# Altium PCB SCMLI_Snipped.PcbDoc (part 3 of 5)
Units mil, origin at the board's own origin, x right, y up, seen from the top; angles counter-clockwise.
Board outline 12129 x 3278 mil, 4 copper layers (Top Layer, GNDPlane, PowRet, Bottom Layer), stack 25.6 mil thick; 452 components, 391 nets, 1786 pads, 827 vias.
Unrouted connection lines stored in the file: 1.
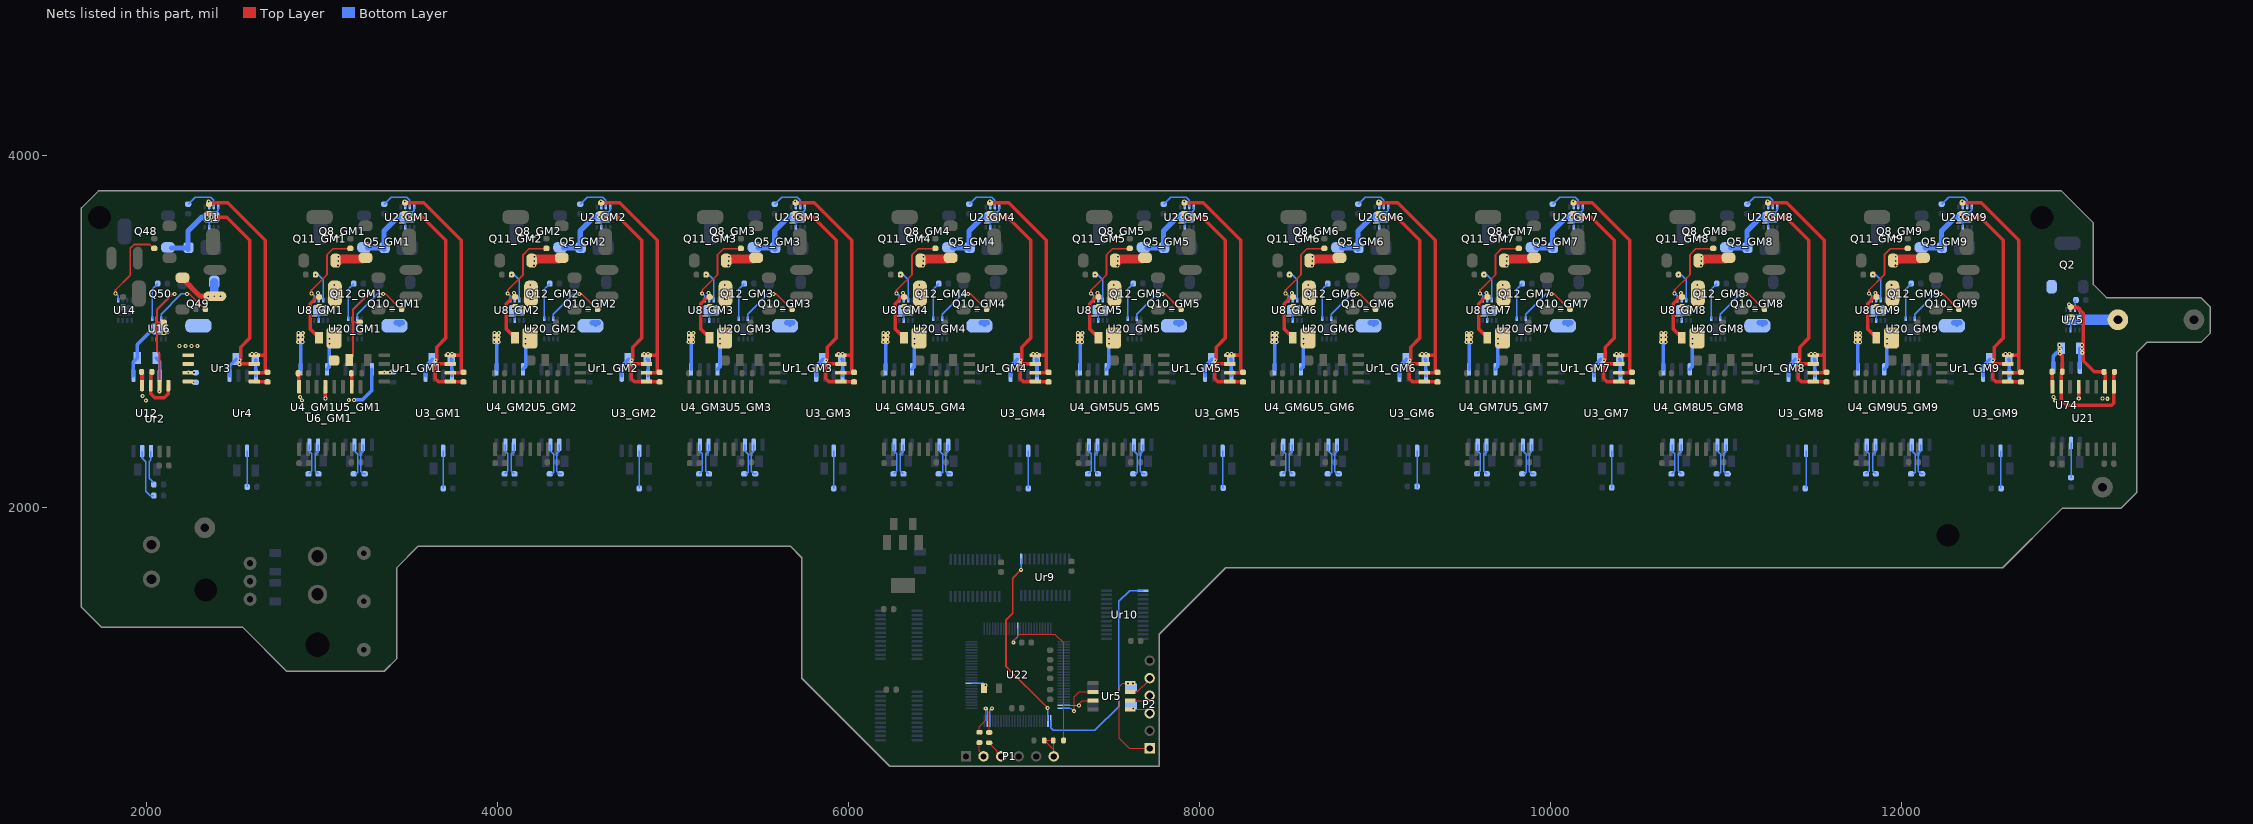
[diagram p5: the nets of this part, all layers, seen from the top]

## Via types
v1: diameter 23, hole 10, Top Layer to Bottom Layer, 827 vias

## Nets (pads, with @x,y where several pads share a name; then routed paths per layer and width w, separated by ;. In a path a pad name is that pad's centre, name@x,y a point inside that pad or via, vN(x,y) a via of type N, cw(c..) or ccw(c..) an arc to the next point about the centre after c; other vN are vias at no path point) (continued)
LE_LATCH4: U22.52 Ur9.13 | length 1057.7
  Top Layer w10: v1(6983,1642) 6936,1595 6936,1394 6897,1355 6897,1093 v1(7135,855)
  Bottom Layer w8: v1(6983,1642) Ur9.13@6983,1704 ; v1(7135,855) 7136.61,853.39 U22.52@7136.61,781.16
LE_LATCH5: U22.51 Ur10.13 | length 1253.2
  Bottom Layer w8: U22.51@7152.36,781.16 7152.36,741.64 7167,727 7404,727 7540,863 7540,1462 7602,1524 Ur10.13@7679,1524
MCLR: P1.6 R26.1 R27.2 | length 185.6
  Top Layer w7: R27.2@7164.97,670.5 R26.1@7115.03,670.5 7168.5,617.03 ; 7168.5,609.5 7168.5,617.03 ; R27.2@7168.5,669.5 7168.5,617.03
MCU_RX1: U22.49 Ur5.7 | length 183.4
  Top Layer w7: v1(7314,870) 7314,879 7332,897 Ur5.7@7392.7,897
  Bottom Layer w7: U22.49@7225.88,870.43 7313.57,870.43 v1(7314,870)
MCU_TX1: U22.50 Ur5.6 | length 267.2
  Top Layer w7: v1(7285,837) 7285,918 7314,947 Ur5.6@7392.7,947
  Bottom Layer w7: U22.50@7225.88,854.68 7267.32,854.68 v1(7285,837)
NetC18_1: C18.1 U22.85 | length 84.7
  Bottom Layer w8: U22.85@6700.88,996.41 6768.03,996.41 v1(6780.44,984)
NetCr5_1_1: Cr5_1.1 P2.3 Ur5.1 | length 119.8
  Top Layer w7: Ur5.1@7605.3,847 7694,847 P2.3@7716,825
  other v1: 7623,852
NetCr5_1_2: Cr5_1.2 P2.1 Ur5.4 | length 562.2
  Top Layer w7: Ur5.4@7605.3,997 7563,997 7543,977 7543,682 7600,625 P2.1@7716,625
  other v1: 7592,994 7621,995
NetP2_4: P2.4 Ur5.2 | length 122.3
  Top Layer w7: Ur5.2@7605.3,897 7688,897 P2.4@7716,925
NetP2_5: P2.5 Ur5.3 | length 147.7
  Top Layer w7: Ur5.3@7605.3,947 7646,947 7716,1017 P2.5@7716,1025
NetR1_1: R1.1 U1.7 | length 207.9
  Bottom Layer w8: R1.1@2238,3725.94 2278.06,3766 2366,3766 2383.8,3748.2 U1.7@2383.8,3710.07
NetR2_1: R2.1 U12.2 | length 192.1
  Bottom Layer w8: U12.2@2026,2319 2026,2269 2016,2259 2016,2163.56 R2.1@2039,2140.56
NetR4_1: R4.1 U12.3 | length 294.1
  Bottom Layer w8: U12.3@1976,2319 1976,2278 1997,2257 1997,2089 2021,2065 R4.1@2042.44,2065
NetR6_1: R6.1 U16.7 | length 362.4
  Top Layer w10: v1(2232,3214) 2245,3214 2328.3,3130.7 R6.1@2339.26,3130.7
  Bottom Layer w8: U16.7@2084.8,3073.07 2084.8,3098.8 2200,3214 v1(2232,3214)
NetR8_1: R8.1 U16.5 | length 213.5
  Bottom Layer w8: U16.5@2033,3072.5 2033,3241.56 R8.1@2064.44,3273
NetR10_1: R10.1 U14.5 | length 489.6
  Top Layer w10: v1(1824.21,3217) 1824.21,3236.21 1908,3320 1908,3474 1929.96,3495.96 2018.89,3495.96 R10.1@2042.85,3472
  Bottom Layer w10: v1(1824.21,3217) 1839.14,3202.07 U14.5@1839.14,3179.21
NetR16_GM1_1: R16_GM1.1 U3_GM1.2 | length 214.2
  Bottom Layer w8: U3_GM1.2@3691,2320 3691,2106.44 R16_GM1.1@3691.44,2106
NetR16_GM2_1: R16_GM2.1 U3_GM2.2 | length 214.2
  Bottom Layer w8: U3_GM2.2@4808,2320 4808,2106.44 R16_GM2.1@4808.44,2106
NetR16_GM3_1: R16_GM3.1 U3_GM3.2 | length 214.2
  Bottom Layer w8: U3_GM3.2@5916,2320 5916,2106.44 R16_GM3.1@5916.44,2106
NetR16_GM4_1: R16_GM4.1 U3_GM4.2 | length 214.2
  Bottom Layer w8: U3_GM4.2@7024,2320 7024,2106.44 R16_GM4.1@7024.44,2106
NetR16_GM5_1: R16_GM5.1 U3_GM5.2 | length 214.2
  Bottom Layer w8: U3_GM5.2@8132,2320 8132,2106.44 R16_GM5.1@8132.44,2106
NetR16_GM6_1: R16_GM6.1 U3_GM6.2 | length 214.2
  Bottom Layer w8: U3_GM6.2@9240,2320 9240,2106.44 R16_GM6.1@9240.44,2106
NetR16_GM7_1: R16_GM7.1 U3_GM7.2 | length 214.2
  Bottom Layer w8: U3_GM7.2@10348,2320 10348,2106.44 R16_GM7.1@10348.44,2106
NetR16_GM8_1: R16_GM8.1 U3_GM8.2 | length 214.2
  Bottom Layer w8: U3_GM8.2@11456,2320 11456,2106.44 R16_GM8.1@11456.44,2106
NetR16_GM9_1: R16_GM9.1 U3_GM9.2 | length 214.2
  Bottom Layer w8: U3_GM9.2@12564,2320 12564,2106.44 R16_GM9.1@12564.44,2106
NetR17_GM1_1: R17_GM1.1 U4_GM1.2 | length 179.8
  Bottom Layer w8: U4_GM1.2@2978.28,2355 2978.28,2315.14 2963,2299.87 2963,2205.56 R17_GM1.1@2980,2188.56
NetR17_GM2_1: R17_GM2.1 U4_GM2.2 | length 179.8
  Bottom Layer w8: U4_GM2.2@4095.28,2355 4095.28,2315.14 4080,2299.87 4080,2205.56 R17_GM2.1@4097,2188.56
NetR17_GM3_1: R17_GM3.1 U4_GM3.2 | length 179.8
  Bottom Layer w8: U4_GM3.2@5203.28,2355 5203.28,2315.14 5188,2299.87 5188,2205.56 R17_GM3.1@5205,2188.56
NetR17_GM4_1: R17_GM4.1 U4_GM4.2 | length 179.8
  Bottom Layer w8: U4_GM4.2@6311.28,2355 6311.28,2315.14 6296,2299.87 6296,2205.56 R17_GM4.1@6313,2188.56
NetR17_GM5_1: R17_GM5.1 U4_GM5.2 | length 179.8
  Bottom Layer w8: U4_GM5.2@7419.28,2355 7419.28,2315.14 7404,2299.87 7404,2205.56 R17_GM5.1@7421,2188.56
NetR17_GM6_1: R17_GM6.1 U4_GM6.2 | length 179.8
  Bottom Layer w8: U4_GM6.2@8527.28,2355 8527.28,2315.14 8512,2299.87 8512,2205.56 R17_GM6.1@8529,2188.56
NetR17_GM7_1: R17_GM7.1 U4_GM7.2 | length 179.8
  Bottom Layer w8: U4_GM7.2@9635.28,2355 9635.28,2315.14 9620,2299.87 9620,2205.56 R17_GM7.1@9637,2188.56
NetR17_GM8_1: R17_GM8.1 U4_GM8.2 | length 179.8
  Bottom Layer w8: U4_GM8.2@10743.28,2355 10743.28,2315.14 10728,2299.87 10728,2205.56 R17_GM8.1@10745,2188.56
NetR17_GM9_1: R17_GM9.1 U4_GM9.2 | length 179.8
  Bottom Layer w8: U4_GM9.2@11851.28,2355 11851.28,2315.14 11836,2299.87 11836,2205.56 R17_GM9.1@11853,2188.56
NetR18_GM1_2: R18_GM1.2 U4_GM1.3 | length 180.4
  Bottom Layer w8: R18_GM1.2@2924,2188.56 2943,2207.56 2943,2302.21 2928.28,2316.93 U4_GM1.3@2928.28,2355
NetR18_GM2_2: R18_GM2.2 U4_GM2.3 | length 180.4
  Bottom Layer w8: R18_GM2.2@4041,2188.56 4060,2207.56 4060,2302.21 4045.28,2316.93 U4_GM2.3@4045.28,2355
NetR18_GM3_2: R18_GM3.2 U4_GM3.3 | length 180.4
  Bottom Layer w8: R18_GM3.2@5149,2188.56 5168,2207.56 5168,2302.21 5153.28,2316.93 U4_GM3.3@5153.28,2355
NetR18_GM4_2: R18_GM4.2 U4_GM4.3 | length 180.4
  Bottom Layer w8: R18_GM4.2@6257,2188.56 6276,2207.56 6276,2302.21 6261.28,2316.93 U4_GM4.3@6261.28,2355
NetR18_GM5_2: R18_GM5.2 U4_GM5.3 | length 180.4
  Bottom Layer w8: R18_GM5.2@7365,2188.56 7384,2207.56 7384,2302.21 7369.28,2316.93 U4_GM5.3@7369.28,2355
NetR18_GM6_2: R18_GM6.2 U4_GM6.3 | length 180.4
  Bottom Layer w8: R18_GM6.2@8473,2188.56 8492,2207.56 8492,2302.21 8477.28,2316.93 U4_GM6.3@8477.28,2355
NetR18_GM7_2: R18_GM7.2 U4_GM7.3 | length 180.4
  Bottom Layer w8: R18_GM7.2@9581,2188.56 9600,2207.56 9600,2302.21 9585.28,2316.93 U4_GM7.3@9585.28,2355
NetR18_GM8_2: R18_GM8.2 U4_GM8.3 | length 180.4
  Bottom Layer w8: R18_GM8.2@10689,2188.56 10708,2207.56 10708,2302.21 10693.28,2316.93 U4_GM8.3@10693.28,2355
NetR18_GM9_2: R18_GM9.2 U4_GM9.3 | length 180.4
  Bottom Layer w8: R18_GM9.2@11797,2188.56 11816,2207.56 11816,2302.21 11801.28,2316.93 U4_GM9.3@11801.28,2355
NetR19_GM1_1: R19_GM1.1 U5_GM1.2 | length 192.6
  Bottom Layer w8: U5_GM1.2@3235,2356 U5_GM1.2@3235,2355 3235,2317 3222,2304 3222,2202.56 3236,2188.56 R19_GM1.1@3244,2188.56 R19_GM1.1@3250,2188.56
NetR19_GM2_1: R19_GM2.1 U5_GM2.2 | length 192.6
  Bottom Layer w8: U5_GM2.2@4352,2356 U5_GM2.2@4352,2355 4352,2317 4339,2304 4339,2202.56 4353,2188.56 R19_GM2.1@4361,2188.56 R19_GM2.1@4367,2188.56
NetR19_GM3_1: R19_GM3.1 U5_GM3.2 | length 192.6
  Bottom Layer w8: U5_GM3.2@5460,2356 U5_GM3.2@5460,2355 5460,2317 5447,2304 5447,2202.56 5461,2188.56 R19_GM3.1@5469,2188.56 R19_GM3.1@5475,2188.56
NetR19_GM4_1: R19_GM4.1 U5_GM4.2 | length 192.6
  Bottom Layer w8: U5_GM4.2@6568,2356 U5_GM4.2@6568,2355 6568,2317 6555,2304 6555,2202.56 6569,2188.56 R19_GM4.1@6577,2188.56 R19_GM4.1@6583,2188.56
NetR19_GM5_1: R19_GM5.1 U5_GM5.2 | length 192.6
  Bottom Layer w8: U5_GM5.2@7676,2356 U5_GM5.2@7676,2355 7676,2317 7663,2304 7663,2202.56 7677,2188.56 R19_GM5.1@7685,2188.56 R19_GM5.1@7691,2188.56
NetR19_GM6_1: R19_GM6.1 U5_GM6.2 | length 192.6
  Bottom Layer w8: U5_GM6.2@8784,2356 U5_GM6.2@8784,2355 8784,2317 8771,2304 8771,2202.56 8785,2188.56 R19_GM6.1@8793,2188.56 R19_GM6.1@8799,2188.56
NetR19_GM7_1: R19_GM7.1 U5_GM7.2 | length 192.6
  Bottom Layer w8: U5_GM7.2@9892,2356 U5_GM7.2@9892,2355 9892,2317 9879,2304 9879,2202.56 9893,2188.56 R19_GM7.1@9901,2188.56 R19_GM7.1@9907,2188.56
NetR19_GM8_1: R19_GM8.1 U5_GM8.2 | length 192.6
  Bottom Layer w8: U5_GM8.2@11000,2356 U5_GM8.2@11000,2355 11000,2317 10987,2304 10987,2202.56 11001,2188.56 R19_GM8.1@11009,2188.56 R19_GM8.1@11015,2188.56
NetR19_GM9_1: R19_GM9.1 U5_GM9.2 | length 192.6
  Bottom Layer w8: U5_GM9.2@12108,2356 U5_GM9.2@12108,2355 12108,2317 12095,2304 12095,2202.56 12109,2188.56 R19_GM9.1@12117,2188.56 R19_GM9.1@12123,2188.56
NetR20_GM1_1: R20_GM1.1 U5_GM1.3 | length 181.3
  Bottom Layer w8: U5_GM1.3@3185,2356 U5_GM1.3@3185,2355 3185,2321 3204,2302 3204,2199.56 R20_GM1.1@3192,2187.56
NetR20_GM2_1: R20_GM2.1 U5_GM2.3 | length 181.3
  Bottom Layer w8: U5_GM2.3@4302,2356 U5_GM2.3@4302,2355 4302,2321 4321,2302 4321,2199.56 R20_GM2.1@4309,2187.56
NetR20_GM3_1: R20_GM3.1 U5_GM3.3 | length 181.3
  Bottom Layer w8: U5_GM3.3@5410,2356 U5_GM3.3@5410,2355 5410,2321 5429,2302 5429,2199.56 R20_GM3.1@5417,2187.56
NetR20_GM4_1: R20_GM4.1 U5_GM4.3 | length 181.3
  Bottom Layer w8: U5_GM4.3@6518,2356 U5_GM4.3@6518,2355 6518,2321 6537,2302 6537,2199.56 R20_GM4.1@6525,2187.56
NetR20_GM5_1: R20_GM5.1 U5_GM5.3 | length 181.3
  Bottom Layer w8: U5_GM5.3@7626,2356 U5_GM5.3@7626,2355 7626,2321 7645,2302 7645,2199.56 R20_GM5.1@7633,2187.56
NetR20_GM6_1: R20_GM6.1 U5_GM6.3 | length 181.3
  Bottom Layer w8: U5_GM6.3@8734,2356 U5_GM6.3@8734,2355 8734,2321 8753,2302 8753,2199.56 R20_GM6.1@8741,2187.56
NetR20_GM7_1: R20_GM7.1 U5_GM7.3 | length 181.3
  Bottom Layer w8: U5_GM7.3@9842,2356 U5_GM7.3@9842,2355 9842,2321 9861,2302 9861,2199.56 R20_GM7.1@9849,2187.56
NetR20_GM8_1: R20_GM8.1 U5_GM8.3 | length 181.3
  Bottom Layer w8: U5_GM8.3@10950,2356 U5_GM8.3@10950,2355 10950,2321 10969,2302 10969,2199.56 R20_GM8.1@10957,2187.56
NetR20_GM9_1: R20_GM9.1 U5_GM9.3 | length 181.3
  Bottom Layer w8: U5_GM9.3@12058,2356 U5_GM9.3@12058,2355 12058,2321 12077,2302 12077,2199.56 R20_GM9.1@12065,2187.56
NetR21_GM1_1: R21_GM1.1 U2_GM1.7 | length 207.9
  Bottom Layer w8: R21_GM1.1@3355,3725.94 3395.06,3766 3483,3766 3500.8,3748.2 U2_GM1.7@3500.8,3710.07
NetR21_GM2_1: R21_GM2.1 U2_GM2.7 | length 207.9
  Bottom Layer w8: R21_GM2.1@4472,3725.94 4512.06,3766 4600,3766 4617.8,3748.2 U2_GM2.7@4617.8,3710.07
NetR21_GM3_1: R21_GM3.1 U2_GM3.7 | length 207.9
  Bottom Layer w8: R21_GM3.1@5580,3725.94 5620.06,3766 5708,3766 5725.8,3748.2 U2_GM3.7@5725.8,3710.07
NetR21_GM4_1: R21_GM4.1 U2_GM4.7 | length 207.9
  Bottom Layer w8: R21_GM4.1@6688,3725.94 6728.06,3766 6816,3766 6833.8,3748.2 U2_GM4.7@6833.8,3710.07
NetR21_GM5_1: R21_GM5.1 U2_GM5.7 | length 207.9
  Bottom Layer w8: R21_GM5.1@7796,3725.94 7836.06,3766 7924,3766 7941.8,3748.2 U2_GM5.7@7941.8,3710.07
NetR21_GM6_1: R21_GM6.1 U2_GM6.7 | length 207.9
  Bottom Layer w8: R21_GM6.1@8904,3725.94 8944.06,3766 9032,3766 9049.8,3748.2 U2_GM6.7@9049.8,3710.07
NetR21_GM7_1: R21_GM7.1 U2_GM7.7 | length 207.9
  Bottom Layer w8: R21_GM7.1@10012,3725.94 10052.06,3766 10140,3766 10157.8,3748.2 U2_GM7.7@10157.8,3710.07
NetR21_GM8_1: R21_GM8.1 U2_GM8.7 | length 207.9
  Bottom Layer w8: R21_GM8.1@11120,3725.94 11160.06,3766 11248,3766 11265.8,3748.2 U2_GM8.7@11265.8,3710.07
NetR21_GM9_1: R21_GM9.1 U2_GM9.7 | length 207.9
  Bottom Layer w8: R21_GM9.1@12228,3725.94 12268.06,3766 12356,3766 12373.8,3748.2 U2_GM9.7@12373.8,3710.07
NetR22_GM1_1: R22_GM1.1 U8_GM1.7 | length 172
  Bottom Layer w8: v1(2963.56,3324) 2979,3324 3007.32,3295.68 U8_GM1.7@3007.32,3179.21
NetR22_GM2_1: R22_GM2.1 U8_GM2.7 | length 172
  Bottom Layer w8: v1(4080.56,3324) 4096,3324 4124.32,3295.68 U8_GM2.7@4124.32,3179.21
NetR22_GM3_1: R22_GM3.1 U8_GM3.7 | length 172
  Bottom Layer w8: v1(5188.56,3324) 5204,3324 5232.32,3295.68 U8_GM3.7@5232.32,3179.21
NetR22_GM4_1: R22_GM4.1 U8_GM4.7 | length 172
  Bottom Layer w8: v1(6296.56,3324) 6312,3324 6340.32,3295.68 U8_GM4.7@6340.32,3179.21
NetR22_GM5_1: R22_GM5.1 U8_GM5.7 | length 172
  Bottom Layer w8: v1(7404.56,3324) 7420,3324 7448.32,3295.68 U8_GM5.7@7448.32,3179.21
NetR22_GM6_1: R22_GM6.1 U8_GM6.7 | length 172
  Bottom Layer w8: v1(8512.56,3324) 8528,3324 8556.32,3295.68 U8_GM6.7@8556.32,3179.21
NetR22_GM7_1: R22_GM7.1 U8_GM7.7 | length 172
  Bottom Layer w8: v1(9620.56,3324) 9636,3324 9664.32,3295.68 U8_GM7.7@9664.32,3179.21
NetR22_GM8_1: R22_GM8.1 U8_GM8.7 | length 172
  Bottom Layer w8: v1(10728.56,3324) 10744,3324 10772.32,3295.68 U8_GM8.7@10772.32,3179.21
NetR22_GM9_1: R22_GM9.1 U8_GM9.7 | length 172
  Bottom Layer w8: v1(11836.56,3324) 11852,3324 11880.32,3295.68 U8_GM9.7@11880.32,3179.21
NetR23_GM1_1: R23_GM1.1 U8_GM1.5 | length 447.5
  Top Layer w10: v1(2941.21,3217) 2941.21,3236.21 3029,3324 3029,3438 3063,3472 R23_GM1.1@3159.85,3472
  Bottom Layer w8: v1(2941.21,3217) 2942.28,3217 2956.14,3203.15 U8_GM1.5@2956.14,3179.21 U8_GM1.5@2956.14,3178.64
NetR23_GM2_1: R23_GM2.1 U8_GM2.5 | length 447.5
  Top Layer w10: v1(4058.21,3217) 4058.21,3236.21 4146,3324 4146,3438 4180,3472 R23_GM2.1@4276.85,3472
  Bottom Layer w8: v1(4058.21,3217) 4059.28,3217 4073.14,3203.15 U8_GM2.5@4073.14,3179.21 U8_GM2.5@4073.14,3178.64
NetR23_GM3_1: R23_GM3.1 U8_GM3.5 | length 447.5
  Top Layer w10: v1(5166.21,3217) 5166.21,3236.21 5254,3324 5254,3438 5288,3472 R23_GM3.1@5384.85,3472
  Bottom Layer w8: v1(5166.21,3217) 5167.28,3217 5181.14,3203.15 U8_GM3.5@5181.14,3179.21 U8_GM3.5@5181.14,3178.64
NetR23_GM4_1: R23_GM4.1 U8_GM4.5 | length 447.5
  Top Layer w10: v1(6274.21,3217) 6274.21,3236.21 6362,3324 6362,3438 6396,3472 R23_GM4.1@6492.85,3472
  Bottom Layer w8: v1(6274.21,3217) 6275.28,3217 6289.14,3203.15 U8_GM4.5@6289.14,3179.21 U8_GM4.5@6289.14,3178.64
NetR23_GM5_1: R23_GM5.1 U8_GM5.5 | length 447.5
  Top Layer w10: v1(7382.21,3217) 7382.21,3236.21 7470,3324 7470,3438 7504,3472 R23_GM5.1@7600.85,3472
  Bottom Layer w8: v1(7382.21,3217) 7383.28,3217 7397.14,3203.15 U8_GM5.5@7397.14,3179.21 U8_GM5.5@7397.14,3178.64
NetR23_GM6_1: R23_GM6.1 U8_GM6.5 | length 447.5
  Top Layer w10: v1(8490.21,3217) 8490.21,3236.21 8578,3324 8578,3438 8612,3472 R23_GM6.1@8708.85,3472
  Bottom Layer w8: v1(8490.21,3217) 8491.28,3217 8505.14,3203.15 U8_GM6.5@8505.14,3179.21 U8_GM6.5@8505.14,3178.64
NetR23_GM7_1: R23_GM7.1 U8_GM7.5 | length 447.5
  Top Layer w10: v1(9598.21,3217) 9598.21,3236.21 9686,3324 9686,3438 9720,3472 R23_GM7.1@9816.85,3472
  Bottom Layer w8: v1(9598.21,3217) 9599.28,3217 9613.14,3203.15 U8_GM7.5@9613.14,3179.21 U8_GM7.5@9613.14,3178.64
NetR23_GM8_1: R23_GM8.1 U8_GM8.5 | length 447.5
  Top Layer w10: v1(10706.21,3217) 10706.21,3236.21 10794,3324 10794,3438 10828,3472 R23_GM8.1@10924.85,3472
  Bottom Layer w8: v1(10706.21,3217) 10707.28,3217 10721.14,3203.15 U8_GM8.5@10721.14,3179.21 U8_GM8.5@10721.14,3178.64
NetR23_GM9_1: R23_GM9.1 U8_GM9.5 | length 447.5
  Top Layer w10: v1(11814.21,3217) 11814.21,3236.21 11902,3324 11902,3438 11936,3472 R23_GM9.1@12032.85,3472
  Bottom Layer w8: v1(11814.21,3217) 11815.28,3217 11829.14,3203.15 U8_GM9.5@11829.14,3179.21 U8_GM9.5@11829.14,3178.64
NetR24_GM1_1: R24_GM1.1 U20_GM1.7 | length 362.4
  Top Layer w10: v1(3349,3214) 3364,3214 3447.3,3130.7 R24_GM1.1@3456.26,3130.7
  Bottom Layer w8: U20_GM1.7@3201.8,3073.07 3201.8,3098.8 3317,3214 v1(3349,3214)
NetR24_GM2_1: R24_GM2.1 U20_GM2.7 | length 362.4
  Top Layer w10: v1(4466,3214) 4481,3214 4564.3,3130.7 R24_GM2.1@4573.26,3130.7
  Bottom Layer w8: U20_GM2.7@4318.8,3073.07 4318.8,3098.8 4434,3214 v1(4466,3214)
NetR24_GM3_1: R24_GM3.1 U20_GM3.7 | length 362.4
  Top Layer w10: v1(5574,3214) 5589,3214 5672.3,3130.7 R24_GM3.1@5681.26,3130.7
  Bottom Layer w8: U20_GM3.7@5426.8,3073.07 5426.8,3098.8 5542,3214 v1(5574,3214)
NetR24_GM4_1: R24_GM4.1 U20_GM4.7 | length 362.4
  Top Layer w10: v1(6682,3214) 6697,3214 6780.3,3130.7 R24_GM4.1@6789.26,3130.7
  Bottom Layer w8: U20_GM4.7@6534.8,3073.07 6534.8,3098.8 6650,3214 v1(6682,3214)
NetR24_GM5_1: R24_GM5.1 U20_GM5.7 | length 362.4
  Top Layer w10: v1(7790,3214) 7805,3214 7888.3,3130.7 R24_GM5.1@7897.26,3130.7
  Bottom Layer w8: U20_GM5.7@7642.8,3073.07 7642.8,3098.8 7758,3214 v1(7790,3214)
NetR24_GM6_1: R24_GM6.1 U20_GM6.7 | length 362.4
  Top Layer w10: v1(8898,3214) 8913,3214 8996.3,3130.7 R24_GM6.1@9005.26,3130.7
  Bottom Layer w8: U20_GM6.7@8750.8,3073.07 8750.8,3098.8 8866,3214 v1(8898,3214)
NetR24_GM7_1: R24_GM7.1 U20_GM7.7 | length 362.4
  Top Layer w10: v1(10006,3214) 10021,3214 10104.3,3130.7 R24_GM7.1@10113.26,3130.7
  Bottom Layer w8: U20_GM7.7@9858.8,3073.07 9858.8,3098.8 9974,3214 v1(10006,3214)
NetR24_GM8_1: R24_GM8.1 U20_GM8.7 | length 362.4
  Top Layer w10: v1(11114,3214) 11129,3214 11212.3,3130.7 R24_GM8.1@11221.26,3130.7
  Bottom Layer w8: U20_GM8.7@10966.8,3073.07 10966.8,3098.8 11082,3214 v1(11114,3214)
NetR24_GM9_1: R24_GM9.1 U20_GM9.7 | length 362.4
  Top Layer w10: v1(12222,3214) 12237,3214 12320.3,3130.7 R24_GM9.1@12329.26,3130.7
  Bottom Layer w8: U20_GM9.7@12074.8,3073.07 12074.8,3098.8 12190,3214 v1(12222,3214)
NetR25_GM1_1: R25_GM1.1 U20_GM1.5 | length 213.5
  Bottom Layer w8: U20_GM1.5@3150,3072.5 3150,3241.56 R25_GM1.1@3181.44,3273
NetR25_GM2_1: R25_GM2.1 U20_GM2.5 | length 213.5
  Bottom Layer w8: U20_GM2.5@4267,3072.5 4267,3241.56 R25_GM2.1@4298.44,3273
NetR25_GM3_1: R25_GM3.1 U20_GM3.5 | length 213.5
  Bottom Layer w8: U20_GM3.5@5375,3072.5 5375,3241.56 R25_GM3.1@5406.44,3273
NetR25_GM4_1: R25_GM4.1 U20_GM4.5 | length 213.5
  Bottom Layer w8: U20_GM4.5@6483,3072.5 6483,3241.56 R25_GM4.1@6514.44,3273
NetR25_GM5_1: R25_GM5.1 U20_GM5.5 | length 213.5
  Bottom Layer w8: U20_GM5.5@7591,3072.5 7591,3241.56 R25_GM5.1@7622.44,3273
NetR25_GM6_1: R25_GM6.1 U20_GM6.5 | length 213.5
  Bottom Layer w8: U20_GM6.5@8699,3072.5 8699,3241.56 R25_GM6.1@8730.44,3273
NetR25_GM7_1: R25_GM7.1 U20_GM7.5 | length 213.5
  Bottom Layer w8: U20_GM7.5@9807,3072.5 9807,3241.56 R25_GM7.1@9838.44,3273
NetR25_GM8_1: R25_GM8.1 U20_GM8.5 | length 213.5
  Bottom Layer w8: U20_GM8.5@10915,3072.5 10915,3241.56 R25_GM8.1@10946.44,3273
NetR25_GM9_1: R25_GM9.1 U20_GM9.5 | length 213.5
  Bottom Layer w8: U20_GM9.5@12023,3072.5 12023,3241.56 R25_GM9.1@12054.44,3273
NetR27_1: R27.1 U22.13 | length 973.8
  Top Layer w7: v1(6939,1229) 6939,1237 6977,1275 7176,1275 7225.03,1225.97 R27.1@7225.03,669.5
  Bottom Layer w7: v1(6939,1229) 6939,1237 6963.38,1261.38 U22.13@6963.38,1306.16
NetR28_2: R28.2 U22.73 | length 219.8
  Top Layer w7: R28.2@6801.5,716.03 6801.5,837.5 v1(6817,853)
  Bottom Layer w8: U22.73@6805.9,781.16 6805.9,841.9 v1(6817,853)
NetR29_2: R29.2 U22.74 | length 226.1
  Top Layer w7: R29.2@6745.94,717.03 6745.94,748.94 6782,785 v1(6782,853)
  Bottom Layer w8: v1(6782,853) 6790.16,844.84 U22.74@6790.16,781.16
NetR98_1: R98.1 U74.2 | length 197.4
  Bottom Layer w8: R98.1@12965,2167.56 U74.2@12965,2365
NetR99_1: R99.1 U75.7 | length 55.1
  Bottom Layer w8: R99.1@12987.59,3180 12987.8,3180 U75.7@12987.8,3125.07
NetRr4_1: Rr4.1 Ur4.2 | length 205.2
  Bottom Layer w8: Ur4.2@2574,2320 2574,2115.44 Rr4.1@2574.44,2115
OUT_LOW2: Cu4_2_GM2.1 Cu8_1_GM2.1 Q5_GM2.3 Q10_GM1.2 Q11_GM2.3 Q12_GM2.2 U4_GM2.5 U8_GM2.3 | length 474.4
  Top Layer w10: Q12_GM2.2@4170.28,3195.15 Q12_GM2.2@4191.26,3216.13
  Top Layer w30: Q12_GM2.2@4170.28,3160.47 Q12_GM2.2@4170.28,3195.15
  Top Layer w50: Q11_GM2.3@4211.55,3399.98 4224.57,3413 Q5_GM2.3@4348.54,3413
  Bottom Layer w8: U8_GM2.3@4098.73,3063.07 4098.73,3108.34 U8_GM2.3@4111.52,3121.14
  Bottom Layer w20: U4_GM2.5@3995.28,2784.13 3995.28,2928.28 v1(4007,2940)
  Bottom Layer w30: Q10_GM1.2@3423.21,3049.89 Q10_GM1.2@3442,3049.89 ; Q10_GM1.2@3442,3041.13 Q10_GM1.2@3442,3049.89 ; Q10_GM1.2@3458.07,3049.89 Q10_GM1.2@3442,3049.89
  other v1: 3982,2940 3983,2966.55 4007,2967.56 4008,2991.17 3983,2992 4088,3131.13 4115,3131.13 4146,3131.13 4187,3184 4188.73,3224 4187,3264.31 4209,3376 4210,3401 4211,3426
OUT_LOW3: Cu4_2_GM3.1 Cu8_1_GM3.1 Q5_GM3.3 Q10_GM2.2 Q11_GM3.3 Q12_GM3.2 U4_GM3.5 U8_GM3.3 | length 474.4
  Top Layer w10: Q12_GM3.2@5278.28,3195.15 Q12_GM3.2@5299.26,3216.13
  Top Layer w30: Q12_GM3.2@5278.28,3160.47 Q12_GM3.2@5278.28,3195.15
  Top Layer w50: Q11_GM3.3@5319.55,3399.98 5332.57,3413 Q5_GM3.3@5456.54,3413
  Bottom Layer w8: U8_GM3.3@5206.73,3063.07 5206.73,3108.34 U8_GM3.3@5219.52,3121.14
  Bottom Layer w20: U4_GM3.5@5103.28,2784.13 5103.28,2928.28 v1(5115,2940)
  Bottom Layer w30: Q10_GM2.2@4540.21,3049.89 Q10_GM2.2@4559,3049.89 ; Q10_GM2.2@4559,3041.13 Q10_GM2.2@4559,3049.89 ; Q10_GM2.2@4575.07,3049.89 Q10_GM2.2@4559,3049.89
  other v1: 5090,2940 5091,2966.55 5115,2967.56 5116,2991.17 5091,2992 5196,3131.13 5223,3131.13 5254,3131.13 5295,3184 5296.73,3224 5295,3264.31 5317,3376 5318,3401 5319,3426
OUT_LOW4: Cu4_2_GM4.1 Cu8_1_GM4.1 Q5_GM4.3 Q10_GM3.2 Q11_GM4.3 Q12_GM4.2 U4_GM4.5 U8_GM4.3 | length 474.4
  Top Layer w10: Q12_GM4.2@6386.28,3195.15 Q12_GM4.2@6407.26,3216.13
  Top Layer w30: Q12_GM4.2@6386.28,3160.47 Q12_GM4.2@6386.28,3195.15
  Top Layer w50: Q11_GM4.3@6427.55,3399.98 6440.57,3413 Q5_GM4.3@6564.54,3413
  Bottom Layer w8: U8_GM4.3@6314.73,3063.07 6314.73,3108.34 U8_GM4.3@6327.52,3121.14
  Bottom Layer w20: U4_GM4.5@6211.28,2784.13 6211.28,2928.28 v1(6223,2940)
  Bottom Layer w30: Q10_GM3.2@5648.21,3049.89 Q10_GM3.2@5667,3049.89 ; Q10_GM3.2@5667,3041.13 Q10_GM3.2@5667,3049.89 ; Q10_GM3.2@5683.07,3049.89 Q10_GM3.2@5667,3049.89
  other v1: 6198,2940 6199,2966.55 6223,2967.56 6224,2991.17 6199,2992 6304,3131.13 6331,3131.13 6362,3131.13 6403,3184 6404.73,3224 6403,3264.31 6425,3376 6426,3401 6427,3426
OUT_LOW5: Cu4_2_GM5.1 Cu8_1_GM5.1 Q5_GM5.3 Q10_GM4.2 Q11_GM5.3 Q12_GM5.2 U4_GM5.5 U8_GM5.3 | length 474.4
  Top Layer w10: Q12_GM5.2@7494.28,3195.15 Q12_GM5.2@7515.26,3216.13
  Top Layer w30: Q12_GM5.2@7494.28,3160.47 Q12_GM5.2@7494.28,3195.15
  Top Layer w50: Q11_GM5.3@7535.55,3399.98 7548.57,3413 Q5_GM5.3@7672.54,3413
  Bottom Layer w8: U8_GM5.3@7422.73,3063.07 7422.73,3108.34 U8_GM5.3@7435.52,3121.14
  Bottom Layer w20: U4_GM5.5@7319.28,2784.13 7319.28,2928.28 v1(7331,2940)
  Bottom Layer w30: Q10_GM4.2@6756.21,3049.89 Q10_GM4.2@6775,3049.89 ; Q10_GM4.2@6775,3041.13 Q10_GM4.2@6775,3049.89 ; Q10_GM4.2@6791.07,3049.89 Q10_GM4.2@6775,3049.89
  other v1: 7306,2940 7307,2966.55 7331,2967.56 7332,2991.17 7307,2992 7412,3131.13 7439,3131.13 7470,3131.13 7511,3184 7512.73,3224 7511,3264.31 7533,3376 7534,3401 7535,3426
OUT_LOW6: Cu4_2_GM6.1 Cu8_1_GM6.1 Q5_GM6.3 Q10_GM5.2 Q11_GM6.3 Q12_GM6.2 U4_GM6.5 U8_GM6.3 | length 474.4
  Top Layer w10: Q12_GM6.2@8602.28,3195.15 Q12_GM6.2@8623.26,3216.13
  Top Layer w30: Q12_GM6.2@8602.28,3160.47 Q12_GM6.2@8602.28,3195.15
  Top Layer w50: Q11_GM6.3@8643.55,3399.98 8656.57,3413 Q5_GM6.3@8780.54,3413
  Bottom Layer w8: U8_GM6.3@8530.73,3063.07 8530.73,3108.34 U8_GM6.3@8543.52,3121.14
  Bottom Layer w20: U4_GM6.5@8427.28,2784.13 8427.28,2928.28 v1(8439,2940)
  Bottom Layer w30: Q10_GM5.2@7864.21,3049.89 Q10_GM5.2@7883,3049.89 ; Q10_GM5.2@7883,3041.13 Q10_GM5.2@7883,3049.89 ; Q10_GM5.2@7899.07,3049.89 Q10_GM5.2@7883,3049.89
  other v1: 8414,2940 8415,2966.55 8439,2967.56 8440,2991.17 8415,2992 8520,3131.13 8547,3131.13 8578,3131.13 8619,3184 8620.73,3224 8619,3264.31 8641,3376 8642,3401 8643,3426
OUT_LOW7: Cu4_2_GM7.1 Cu8_1_GM7.1 Q5_GM7.3 Q10_GM6.2 Q11_GM7.3 Q12_GM7.2 U4_GM7.5 U8_GM7.3 | length 474.4
  Top Layer w10: Q12_GM7.2@9710.28,3195.15 Q12_GM7.2@9731.26,3216.13
  Top Layer w30: Q12_GM7.2@9710.28,3160.47 Q12_GM7.2@9710.28,3195.15
  Top Layer w50: Q11_GM7.3@9751.55,3399.98 9764.57,3413 Q5_GM7.3@9888.54,3413
  Bottom Layer w8: U8_GM7.3@9638.73,3063.07 9638.73,3108.34 U8_GM7.3@9651.52,3121.14
  Bottom Layer w20: U4_GM7.5@9535.28,2784.13 9535.28,2928.28 v1(9547,2940)
  Bottom Layer w30: Q10_GM6.2@8972.21,3049.89 Q10_GM6.2@8991,3049.89 ; Q10_GM6.2@8991,3041.13 Q10_GM6.2@8991,3049.89 ; Q10_GM6.2@9007.07,3049.89 Q10_GM6.2@8991,3049.89
  other v1: 9522,2940 9523,2966.55 9547,2967.56 9548,2991.17 9523,2992 9628,3131.13 9655,3131.13 9686,3131.13 9727,3184 9728.73,3224 9727,3264.31 9749,3376 9750,3401 9751,3426
OUT_LOW8: Cu4_2_GM8.1 Cu8_1_GM8.1 Q5_GM8.3 Q10_GM7.2 Q11_GM8.3 Q12_GM8.2 U4_GM8.5 U8_GM8.3 | length 474.4
  Top Layer w10: Q12_GM8.2@10818.28,3195.15 Q12_GM8.2@10839.26,3216.13
  Top Layer w30: Q12_GM8.2@10818.28,3160.47 Q12_GM8.2@10818.28,3195.15
  Top Layer w50: Q11_GM8.3@10859.55,3399.98 10872.57,3413 Q5_GM8.3@10996.54,3413
  Bottom Layer w8: U8_GM8.3@10746.73,3063.07 10746.73,3108.34 U8_GM8.3@10759.52,3121.14
  Bottom Layer w20: U4_GM8.5@10643.28,2784.13 10643.28,2928.28 v1(10655,2940)
  Bottom Layer w30: Q10_GM7.2@10080.21,3049.89 Q10_GM7.2@10099,3049.89 ; Q10_GM7.2@10099,3041.13 Q10_GM7.2@10099,3049.89 ; Q10_GM7.2@10115.07,3049.89 Q10_GM7.2@10099,3049.89
  other v1: 10630,2940 10631,2966.55 10655,2967.56 10656,2991.17 10631,2992 10736,3131.13 10763,3131.13 10794,3131.13 10835,3184 10836.73,3224 10835,3264.31 10857,3376 10858,3401 10859,3426
OUT_LOW9: Cu4_2_GM9.1 Cu8_1_GM9.1 Q5_GM9.3 Q10_GM8.2 Q11_GM9.3 Q12_GM9.2 U4_GM9.5 U8_GM9.3 | length 474.4
  Top Layer w10: Q12_GM9.2@11926.28,3195.15 Q12_GM9.2@11947.26,3216.13
  Top Layer w30: Q12_GM9.2@11926.28,3160.47 Q12_GM9.2@11926.28,3195.15
  Top Layer w50: Q11_GM9.3@11967.55,3399.98 11980.57,3413 Q5_GM9.3@12104.54,3413
  Bottom Layer w8: U8_GM9.3@11854.73,3063.07 11854.73,3108.34 U8_GM9.3@11867.52,3121.14
  Bottom Layer w20: U4_GM9.5@11751.28,2784.13 11751.28,2928.28 v1(11763,2940)
  Bottom Layer w30: Q10_GM8.2@11188.21,3049.89 Q10_GM8.2@11207,3049.89 ; Q10_GM8.2@11207,3041.13 Q10_GM8.2@11207,3049.89 ; Q10_GM8.2@11223.07,3049.89 Q10_GM8.2@11207,3049.89
  other v1: 11738,2940 11739,2966.55 11763,2967.56 11764,2991.17 11739,2992 11844,3131.13 11871,3131.13 11902,3131.13 11943,3184 11944.73,3224 11943,3264.31 11965,3376 11966,3401 11967,3426
OUT_LOW10: C14.1 C15.1 Cu74_2.1 Cu75_1.1 J3.1 Q2.3 Q10_GM9.2 U21.9 U21.15 U74.5 U75.3 U75.8 | length 1327.8
  Top Layer w20: v1(12901,2875) 12915.53,2860.47 C14.1@12915.53,2771 12909,2764.47 U21.15@12909,2685 12909,2612 12942,2579 13196,2579 13209,2592 U21.9@13209,2685 13209,2766.47 C15.1@13212.53,2770
  Bottom Layer w8: U75.3@12962.2,3008.93 12962.2,3067 U75.3@12975,3067 ; U75.3@13013.39,3067 U75.8@13013.39,3125.07
  Bottom Layer w20: U74.5@12865,2794.13 12865,2860.15 Cu74_2.1@12908.85,2904
  Bottom Layer w30: Q10_GM9.2@12296.21,3049.89 Q10_GM9.2@12315,3049.89 ; Q10_GM9.2@12315,3041.13 Q10_GM9.2@12315,3049.89 ; Q10_GM9.2@12331.07,3049.89 Q10_GM9.2@12315,3049.89
  Bottom Layer w50: U75.3@12975,3067 U75.3@13013.39,3067
  Bottom Layer w60: U75.3@13013.39,3067 J3.1@13232,3067
  other v1: 12901,2898.47 12900,2923.72 12950.48,3077 12976.48,3077
PGEC: P1.2 R29.1 | length 84.5
  Top Layer w7: R29.1@6745.5,659.5 6745.5,607.5 P1.2@6768.5,584.5
PGED: P1.3 R28.1 | length 104.2
  Top Layer w7: R28.1@6801.5,655.5 6848.5,608.5 6848.5,600.5 P1.3@6869.5,579.5
REFA1: Cr3_3.1 Cr4_2.1 Cu1_1.1 D12.1 Q48.3 U1.3 U1.8 Ur3.5 Ur3.7 Ur4.5 | length 1710.6
  Top Layer w20: v1(2371,3652) 2457,3652 2589,3520 2589,2963 2537,2911 v1@2537,2842 ; v1(2531,2813) 2533,2815 Ur3.7@2615.19,2815 ; Ur3.5@2615.19,2715 Cr3_3.1@2677.44,2715
  Bottom Layer w8: U1.3@2358.2,3593.93 U1.3@2358.2,3639.2 ; v1(2371,3652) 2409.39,3690.39 U1.8@2409.39,3710.07
  Bottom Layer w20: Ur4.5@2474,2749.13 2474,2804.15 Cr4_2.1@2512.85,2843
  Bottom Layer w30: Q48.3@2144.26,3476.13 D12.1@2234.21,3476.13 ; D12.1@2237.21,3467.13 2237.21,3572.21 2317,3652 v1(2371,3652)
  other v1: 2531,2836 2346,3653 2397,3653
REFA1_5V: Cr3_3.2 Cr4_2.2 Cu1_1.2 U1.6 Ur3.6 Ur3.8 Ur4.8 | length 1386.4
  Top Layer w20: Cu1_1.2@2367,3734 2463,3734 2677.44,3519.56 2677.44,2876.44 ; Ur3.6@2615.19,2765 Cr3_3.2@2677.44,2765 ; Ur3.8@2615.19,2865 2663,2865 ; 2669.5,2868.5 2677.44,2876.44 ; Cr3_3.2@2677.44,2775 2677.44,2876.44
  Bottom Layer w8: v1(2355,3741) 2358.2,3737.8 U1.6@2358.2,3710.07
  Bottom Layer w20: Ur4.8@2624,2749.13 Cr4_2.2@2624,2838.15
  other v1: 2602,2872 2624,2873
REFA_5V_GM1: Cr1_2_GM1.2 Cu2_1_GM1.2 Cu3_2_GM1.2 U2_GM1.6 U3_GM1.8 Ur1_GM1.6 Ur1_GM1.8 | length 1411
  Top Layer w20: Cr1_2_GM1.2@3484,3734 3580,3734 3794.44,3519.56 3794.44,2876.44 ; Ur1_GM1.6@3732.19,2765 Cu2_1_GM1.2@3794.44,2765 ; Ur1_GM1.8@3732.19,2865 3780,2865 ; 3786.5,2868.5 3794.44,2876.44 ; Cu2_1_GM1.2@3807,2762.44 3794.44,2775 3794.44,2876.44
  Bottom Layer w8: v1(3472,3741) 3475.2,3737.8 U2_GM1.6@3475.2,3710.07
  Bottom Layer w20: Cu3_2_GM1.2@3736.15,2843 3741,2838.15 U3_GM1.8@3741,2749.13
  other v1: 3719,2872 3741,2873
REFA_5V_GM2: Cr1_2_GM2.2 Cu2_1_GM2.2 Cu3_2_GM2.2 U2_GM2.6 U3_GM2.8 Ur1_GM2.6 Ur1_GM2.8 | length 1411
  Top Layer w20: Cr1_2_GM2.2@4601,3734 4697,3734 4911.44,3519.56 4911.44,2876.44 ; Ur1_GM2.6@4849.19,2765 Cu2_1_GM2.2@4911.44,2765 ; Ur1_GM2.8@4849.19,2865 4897,2865 ; 4903.5,2868.5 4911.44,2876.44 ; Cu2_1_GM2.2@4924,2762.44 4911.44,2775 4911.44,2876.44
  Bottom Layer w8: v1(4589,3741) 4592.2,3737.8 U2_GM2.6@4592.2,3710.07
  Bottom Layer w20: Cu3_2_GM2.2@4853.15,2843 4858,2838.15 U3_GM2.8@4858,2749.13
  other v1: 4836,2872 4858,2873
REFA_5V_GM3: Cr1_2_GM3.2 Cu2_1_GM3.2 Cu3_2_GM3.2 U2_GM3.6 U3_GM3.8 Ur1_GM3.6 Ur1_GM3.8 | length 1411
  Top Layer w20: Cr1_2_GM3.2@5709,3734 5805,3734 6019.44,3519.56 6019.44,2876.44 ; Ur1_GM3.6@5957.19,2765 Cu2_1_GM3.2@6019.44,2765 ; Ur1_GM3.8@5957.19,2865 6005,2865 ; 6011.5,2868.5 6019.44,2876.44 ; Cu2_1_GM3.2@6032,2762.44 6019.44,2775 6019.44,2876.44
  Bottom Layer w8: v1(5697,3741) 5700.2,3737.8 U2_GM3.6@5700.2,3710.07
  Bottom Layer w20: Cu3_2_GM3.2@5961.15,2843 5966,2838.15 U3_GM3.8@5966,2749.13
  other v1: 5944,2872 5966,2873
REFA_5V_GM4: Cr1_2_GM4.2 Cu2_1_GM4.2 Cu3_2_GM4.2 U2_GM4.6 U3_GM4.8 Ur1_GM4.6 Ur1_GM4.8 | length 1411
  Top Layer w20: Cr1_2_GM4.2@6817,3734 6913,3734 7127.44,3519.56 7127.44,2876.44 ; Ur1_GM4.6@7065.19,2765 Cu2_1_GM4.2@7127.44,2765 ; Ur1_GM4.8@7065.19,2865 7113,2865 ; 7119.5,2868.5 7127.44,2876.44 ; Cu2_1_GM4.2@7140,2762.44 7127.44,2775 7127.44,2876.44
  Bottom Layer w8: v1(6805,3741) 6808.2,3737.8 U2_GM4.6@6808.2,3710.07
  Bottom Layer w20: Cu3_2_GM4.2@7069.15,2843 7074,2838.15 U3_GM4.8@7074,2749.13
  other v1: 7052,2872 7074,2873
REFA_5V_GM5: Cr1_2_GM5.2 Cu2_1_GM5.2 Cu3_2_GM5.2 U2_GM5.6 U3_GM5.8 Ur1_GM5.6 Ur1_GM5.8 | length 1411
  Top Layer w20: Cr1_2_GM5.2@7925,3734 8021,3734 8235.44,3519.56 8235.44,2876.44 ; Ur1_GM5.6@8173.19,2765 Cu2_1_GM5.2@8235.44,2765 ; Ur1_GM5.8@8173.19,2865 8221,2865 ; 8227.5,2868.5 8235.44,2876.44 ; Cu2_1_GM5.2@8248,2762.44 8235.44,2775 8235.44,2876.44
  Bottom Layer w8: v1(7913,3741) 7916.2,3737.8 U2_GM5.6@7916.2,3710.07
  Bottom Layer w20: Cu3_2_GM5.2@8177.15,2843 8182,2838.15 U3_GM5.8@8182,2749.13
  other v1: 8160,2872 8182,2873
REFA_5V_GM6: Cr1_2_GM6.2 Cu2_1_GM6.2 Cu3_2_GM6.2 U2_GM6.6 U3_GM6.8 Ur1_GM6.6 Ur1_GM6.8 | length 1411
  Top Layer w20: Cr1_2_GM6.2@9033,3734 9129,3734 9343.44,3519.56 9343.44,2876.44 ; Ur1_GM6.6@9281.19,2765 Cu2_1_GM6.2@9343.44,2765 ; Ur1_GM6.8@9281.19,2865 9329,2865 ; 9335.5,2868.5 9343.44,2876.44 ; Cu2_1_GM6.2@9356,2762.44 9343.44,2775 9343.44,2876.44
  Bottom Layer w8: v1(9021,3741) 9024.2,3737.8 U2_GM6.6@9024.2,3710.07
  Bottom Layer w20: Cu3_2_GM6.2@9285.15,2843 9290,2838.15 U3_GM6.8@9290,2749.13
  other v1: 9268,2872 9290,2873
REFA_5V_GM7: Cr1_2_GM7.2 Cu2_1_GM7.2 Cu3_2_GM7.2 U2_GM7.6 U3_GM7.8 Ur1_GM7.6 Ur1_GM7.8 | length 1411
  Top Layer w20: Cr1_2_GM7.2@10141,3734 10237,3734 10451.44,3519.56 10451.44,2876.44 ; Ur1_GM7.6@10389.19,2765 Cu2_1_GM7.2@10451.44,2765 ; Ur1_GM7.8@10389.19,2865 10437,2865 ; 10443.5,2868.5 10451.44,2876.44 ; Cu2_1_GM7.2@10464,2762.44 10451.44,2775 10451.44,2876.44
  Bottom Layer w8: v1(10129,3741) 10132.2,3737.8 U2_GM7.6@10132.2,3710.07
  Bottom Layer w20: Cu3_2_GM7.2@10393.15,2843 10398,2838.15 U3_GM7.8@10398,2749.13
  other v1: 10376,2872 10398,2873
REFA_5V_GM8: Cr1_2_GM8.2 Cu2_1_GM8.2 Cu3_2_GM8.2 U2_GM8.6 U3_GM8.8 Ur1_GM8.6 Ur1_GM8.8 | length 1411
  Top Layer w20: Cr1_2_GM8.2@11249,3734 11345,3734 11559.44,3519.56 11559.44,2876.44 ; Ur1_GM8.6@11497.19,2765 Cu2_1_GM8.2@11559.44,2765 ; Ur1_GM8.8@11497.19,2865 11545,2865 ; 11551.5,2868.5 11559.44,2876.44 ; Cu2_1_GM8.2@11572,2762.44 11559.44,2775 11559.44,2876.44
  Bottom Layer w8: v1(11237,3741) 11240.2,3737.8 U2_GM8.6@11240.2,3710.07
  Bottom Layer w20: Cu3_2_GM8.2@11501.15,2843 11506,2838.15 U3_GM8.8@11506,2749.13
  other v1: 11484,2872 11506,2873
REFA_5V_GM9: Cr1_2_GM9.2 Cu2_1_GM9.2 Cu3_2_GM9.2 U2_GM9.6 U3_GM9.8 Ur1_GM9.6 Ur1_GM9.8 | length 1411
  Top Layer w20: Cr1_2_GM9.2@12357,3734 12453,3734 12667.44,3519.56 12667.44,2876.44 ; Ur1_GM9.6@12605.19,2765 Cu2_1_GM9.2@12667.44,2765 ; Ur1_GM9.8@12605.19,2865 12653,2865 ; 12659.5,2868.5 12667.44,2876.44 ; Cu2_1_GM9.2@12680,2762.44 12667.44,2775 12667.44,2876.44
  Bottom Layer w8: v1(12345,3741) 12348.2,3737.8 U2_GM9.6@12348.2,3710.07
  Bottom Layer w20: Cu3_2_GM9.2@12609.15,2843 12614,2838.15 U3_GM9.8@12614,2749.13
  other v1: 12592,2872 12614,2873
REFA_GM1: Cr1_2_GM1.1 Cu2_1_GM1.1 Cu3_2_GM1.1 D5_GM1.1 Q8_GM1.3 U2_GM1.3 U2_GM1.8 U3_GM1.5 Ur1_GM1.5 Ur1_GM1.7 | length 1900.4
  Top Layer w20: v1(3488,3652) 3574,3652 3706,3520 3706,2963 3654,2911 3654,2842 v1(3648,2836) ; 3662.19,2715 3646,2731.19 3646,2800 3661,2815 Ur1_GM1.7@3732.19,2815 ; 3665,2715 Ur1_GM1.5@3725.57,2715 ; Ur1_GM1.5@3732.19,2715 Cu2_1_GM1.1@3794.44,2715 ; Cu2_1_GM1.1@3807,2712.44 Cu2_1_GM1.1@3809.56,2709.88
  Bottom Layer w8: U2_GM1.3@3475.2,3593.93 3475.2,3639.2 v1(3488,3652) 3526.39,3690.39 U2_GM1.8@3526.39,3710.07
  Bottom Layer w20: U3_GM1.5@3591,2749.13 3591,2804.15 Cu3_2_GM1.1@3629.85,2843
  Bottom Layer w30: Q8_GM1.3@3261.26,3476.13 D5_GM1.1@3351.21,3476.13 ; D5_GM1.1@3354.21,3467.13 3354.21,3572.21 3434,3652 v1(3488,3652)
  other v1: 3648,2813 3463,3653 3514,3653
REFA_GM2: Cr1_2_GM2.1 Cu2_1_GM2.1 Cu3_2_GM2.1 D5_GM2.1 Q8_GM2.3 U2_GM2.3 U2_GM2.8 U3_GM2.5 Ur1_GM2.5 Ur1_GM2.7 | length 1900.4
  Top Layer w20: v1(4605,3652) 4691,3652 4823,3520 4823,2963 4771,2911 4771,2842 v1(4765,2836) ; 4779.19,2715 4763,2731.19 4763,2800 4778,2815 Ur1_GM2.7@4849.19,2815 ; 4782,2715 Ur1_GM2.5@4842.57,2715 ; Ur1_GM2.5@4849.19,2715 Cu2_1_GM2.1@4911.44,2715 ; Cu2_1_GM2.1@4924,2712.44 Cu2_1_GM2.1@4926.56,2709.88
  Bottom Layer w8: U2_GM2.3@4592.2,3593.93 4592.2,3639.2 v1(4605,3652) 4643.39,3690.39 U2_GM2.8@4643.39,3710.07
  Bottom Layer w20: U3_GM2.5@4708,2749.13 4708,2804.15 Cu3_2_GM2.1@4746.85,2843
  Bottom Layer w30: Q8_GM2.3@4378.26,3476.13 D5_GM2.1@4468.21,3476.13 ; D5_GM2.1@4471.21,3467.13 4471.21,3572.21 4551,3652 v1(4605,3652)
  other v1: 4765,2813 4580,3653 4631,3653
REFA_GM3: Cr1_2_GM3.1 Cu2_1_GM3.1 Cu3_2_GM3.1 D5_GM3.1 Q8_GM3.3 U2_GM3.3 U2_GM3.8 U3_GM3.5 Ur1_GM3.5 Ur1_GM3.7 | length 1900.4
  Top Layer w20: v1(5713,3652) 5799,3652 5931,3520 5931,2963 5879,2911 5879,2842 v1(5873,2836) ; 5887.19,2715 5871,2731.19 5871,2800 5886,2815 Ur1_GM3.7@5957.19,2815 ; 5890,2715 Ur1_GM3.5@5950.57,2715 ; Ur1_GM3.5@5957.19,2715 Cu2_1_GM3.1@6019.44,2715 ; Cu2_1_GM3.1@6032,2712.44 Cu2_1_GM3.1@6034.56,2709.88
  Bottom Layer w8: U2_GM3.3@5700.2,3593.93 5700.2,3639.2 v1(5713,3652) 5751.39,3690.39 U2_GM3.8@5751.39,3710.07
  Bottom Layer w20: U3_GM3.5@5816,2749.13 5816,2804.15 Cu3_2_GM3.1@5854.85,2843
  Bottom Layer w30: Q8_GM3.3@5486.26,3476.13 D5_GM3.1@5576.21,3476.13 ; D5_GM3.1@5579.21,3467.13 5579.21,3572.21 5659,3652 v1(5713,3652)
  other v1: 5873,2813 5688,3653 5739,3653
REFA_GM4: Cr1_2_GM4.1 Cu2_1_GM4.1 Cu3_2_GM4.1 D5_GM4.1 Q8_GM4.3 U2_GM4.3 U2_GM4.8 U3_GM4.5 Ur1_GM4.5 Ur1_GM4.7 | length 1900.4
  Top Layer w20: v1(6821,3652) 6907,3652 7039,3520 7039,2963 6987,2911 6987,2842 v1(6981,2836) ; 6995.19,2715 6979,2731.19 6979,2800 6994,2815 Ur1_GM4.7@7065.19,2815 ; 6998,2715 Ur1_GM4.5@7058.57,2715 ; Ur1_GM4.5@7065.19,2715 Cu2_1_GM4.1@7127.44,2715 ; Cu2_1_GM4.1@7140,2712.44 Cu2_1_GM4.1@7142.56,2709.88
  Bottom Layer w8: U2_GM4.3@6808.2,3593.93 6808.2,3639.2 v1(6821,3652) 6859.39,3690.39 U2_GM4.8@6859.39,3710.07
  Bottom Layer w20: U3_GM4.5@6924,2749.13 6924,2804.15 Cu3_2_GM4.1@6962.85,2843
  Bottom Layer w30: Q8_GM4.3@6594.26,3476.13 D5_GM4.1@6684.21,3476.13 ; D5_GM4.1@6687.21,3467.13 6687.21,3572.21 6767,3652 v1(6821,3652)
  other v1: 6981,2813 6796,3653 6847,3653
REFA_GM5: Cr1_2_GM5.1 Cu2_1_GM5.1 Cu3_2_GM5.1 D5_GM5.1 Q8_GM5.3 U2_GM5.3 U2_GM5.8 U3_GM5.5 Ur1_GM5.5 Ur1_GM5.7 | length 1900.4
  Top Layer w20: v1(7929,3652) 8015,3652 8147,3520 8147,2963 8095,2911 8095,2842 v1(8089,2836) ; 8103.19,2715 8087,2731.19 8087,2800 8102,2815 Ur1_GM5.7@8173.19,2815 ; 8106,2715 Ur1_GM5.5@8166.57,2715 ; Ur1_GM5.5@8173.19,2715 Cu2_1_GM5.1@8235.44,2715 ; Cu2_1_GM5.1@8248,2712.44 Cu2_1_GM5.1@8250.56,2709.88
  Bottom Layer w8: U2_GM5.3@7916.2,3593.93 7916.2,3639.2 v1(7929,3652) 7967.39,3690.39 U2_GM5.8@7967.39,3710.07
  Bottom Layer w20: U3_GM5.5@8032,2749.13 8032,2804.15 Cu3_2_GM5.1@8070.85,2843
  Bottom Layer w30: Q8_GM5.3@7702.26,3476.13 D5_GM5.1@7792.21,3476.13 ; D5_GM5.1@7795.21,3467.13 7795.21,3572.21 7875,3652 v1(7929,3652)
  other v1: 8089,2813 7904,3653 7955,3653
REFA_GM6: Cr1_2_GM6.1 Cu2_1_GM6.1 Cu3_2_GM6.1 D5_GM6.1 Q8_GM6.3 U2_GM6.3 U2_GM6.8 U3_GM6.5 Ur1_GM6.5 Ur1_GM6.7 | length 1900.4
  Top Layer w20: v1(9037,3652) 9123,3652 9255,3520 9255,2963 9203,2911 9203,2842 v1(9197,2836) ; 9211.19,2715 9195,2731.19 9195,2800 9210,2815 Ur1_GM6.7@9281.19,2815 ; 9214,2715 Ur1_GM6.5@9274.57,2715 ; Ur1_GM6.5@9281.19,2715 Cu2_1_GM6.1@9343.44,2715 ; Cu2_1_GM6.1@9356,2712.44 Cu2_1_GM6.1@9358.56,2709.88
  Bottom Layer w8: U2_GM6.3@9024.2,3593.93 9024.2,3639.2 v1(9037,3652) 9075.39,3690.39 U2_GM6.8@9075.39,3710.07
  Bottom Layer w20: U3_GM6.5@9140,2749.13 9140,2804.15 Cu3_2_GM6.1@9178.85,2843
  Bottom Layer w30: Q8_GM6.3@8810.26,3476.13 D5_GM6.1@8900.21,3476.13 ; D5_GM6.1@8903.21,3467.13 8903.21,3572.21 8983,3652 v1(9037,3652)
  other v1: 9197,2813 9012,3653 9063,3653
REFA_GM7: Cr1_2_GM7.1 Cu2_1_GM7.1 Cu3_2_GM7.1 D5_GM7.1 Q8_GM7.3 U2_GM7.3 U2_GM7.8 U3_GM7.5 Ur1_GM7.5 Ur1_GM7.7 | length 1900.4
  Top Layer w20: v1(10145,3652) 10231,3652 10363,3520 10363,2963 10311,2911 10311,2842 v1(10305,2836) ; 10319.19,2715 10303,2731.19 10303,2800 10318,2815 Ur1_GM7.7@10389.19,2815 ; 10322,2715 Ur1_GM7.5@10382.57,2715 ; Ur1_GM7.5@10389.19,2715 Cu2_1_GM7.1@10451.44,2715 ; Cu2_1_GM7.1@10464,2712.44 Cu2_1_GM7.1@10466.56,2709.88
  Bottom Layer w8: U2_GM7.3@10132.2,3593.93 10132.2,3639.2 v1(10145,3652) 10183.39,3690.39 U2_GM7.8@10183.39,3710.07
  Bottom Layer w20: U3_GM7.5@10248,2749.13 10248,2804.15 Cu3_2_GM7.1@10286.85,2843
  Bottom Layer w30: Q8_GM7.3@9918.26,3476.13 D5_GM7.1@10008.21,3476.13 ; D5_GM7.1@10011.21,3467.13 10011.21,3572.21 10091,3652 v1(10145,3652)
  other v1: 10305,2813 10120,3653 10171,3653
REFA_GM8: Cr1_2_GM8.1 Cu2_1_GM8.1 Cu3_2_GM8.1 D5_GM8.1 Q8_GM8.3 U2_GM8.3 U2_GM8.8 U3_GM8.5 Ur1_GM8.5 Ur1_GM8.7 | length 1900.4
  Top Layer w20: v1(11253,3652) 11339,3652 11471,3520 11471,2963 11419,2911 11419,2842 v1(11413,2836) ; 11427.19,2715 11411,2731.19 11411,2800 11426,2815 Ur1_GM8.7@11497.19,2815 ; 11430,2715 Ur1_GM8.5@11490.57,2715 ; Ur1_GM8.5@11497.19,2715 Cu2_1_GM8.1@11559.44,2715 ; Cu2_1_GM8.1@11572,2712.44 Cu2_1_GM8.1@11574.56,2709.88
  Bottom Layer w8: U2_GM8.3@11240.2,3593.93 11240.2,3639.2 v1(11253,3652) 11291.39,3690.39 U2_GM8.8@11291.39,3710.07
  Bottom Layer w20: U3_GM8.5@11356,2749.13 11356,2804.15 Cu3_2_GM8.1@11394.85,2843
  Bottom Layer w30: Q8_GM8.3@11026.26,3476.13 D5_GM8.1@11116.21,3476.13 ; D5_GM8.1@11119.21,3467.13 11119.21,3572.21 11199,3652 v1(11253,3652)
  other v1: 11413,2813 11228,3653 11279,3653
REFA_GM9: Cr1_2_GM9.1 Cu2_1_GM9.1 Cu3_2_GM9.1 D5_GM9.1 Q8_GM9.3 U2_GM9.3 U2_GM9.8 U3_GM9.5 Ur1_GM9.5 Ur1_GM9.7 | length 1900.4
  Top Layer w20: v1(12361,3652) 12447,3652 12579,3520 12579,2963 12527,2911 12527,2842 v1(12521,2836) ; 12535.19,2715 12519,2731.19 12519,2800 12534,2815 Ur1_GM9.7@12605.19,2815 ; 12538,2715 Ur1_GM9.5@12598.57,2715 ; Ur1_GM9.5@12605.19,2715 Cu2_1_GM9.1@12667.44,2715 ; Cu2_1_GM9.1@12680,2712.44 Cu2_1_GM9.1@12682.56,2709.88
  Bottom Layer w8: U2_GM9.3@12348.2,3593.93 12348.2,3639.2 v1(12361,3652) 12399.39,3690.39 U2_GM9.8@12399.39,3710.07
  Bottom Layer w20: U3_GM9.5@12464,2749.13 12464,2804.15 Cu3_2_GM9.1@12502.85,2843
  Bottom Layer w30: Q8_GM9.3@12134.26,3476.13 D5_GM9.1@12224.21,3476.13 ; D5_GM9.1@12227.21,3467.13 12227.21,3572.21 12307,3652 v1(12361,3652)
  other v1: 12521,2813 12336,3653 12387,3653
REFB2: Cu4_2_GM1.1 Cu8_1_GM1.1 Q5_GM1.3 Q11_GM1.3 Q12_GM1.2 Q49.2 U4_GM1.5 U8_GM1.3 | length 430.8
  Top Layer w10: Q12_GM1.2@3053.28,3195.15 Q12_GM1.2@3074.26,3216.13
  Top Layer w30: Q12_GM1.2@3053.28,3160.47 Q12_GM1.2@3053.28,3195.15
  Top Layer w50: Q11_GM1.3@3094.55,3399.98 3107.57,3413 Q5_GM1.3@3231.54,3413
  Bottom Layer w8: U8_GM1.3@2981.73,3063.07 2981.73,3108.34 U8_GM1.3@2994.52,3121.14
  Bottom Layer w20: U4_GM1.5@2878.28,2784.13 2878.28,2928.28 v1(2890,2940)
  other v1: 2865,2940 2866,2966.55 2890,2967.56 2891,2991.17 2866,2992 2971,3131.13 2998,3131.13 3029,3131.13 3070,3184 3071.73,3224 3070,3264.31 3092,3376 3093,3401 3094,3426
REFB11_5V: C14.2 C15.2 Cu74_2.2 Cu75_1.2 U21.10 U21.13 U21.16 U74.8 U75.6 | length 887.4
  Top Layer w20: C14.2@12856.47,2771 12859,2768.47 U21.16@12859,2685 ; Cu75_1.2@12963,3139.56 12999.44,3139.56 13034,3105 13034,2833 13097,2770 C15.2@13153.47,2770 13159,2764.47 U21.10@13159,2685 ; v1(13009,2618.05) U21.13@13009,2685
  Bottom Layer w8: v1(12954,3155) 12962.2,3146.8 U75.6@12962.2,3125.07
  Bottom Layer w20: U74.8@13015,2794.13 13015,2903.85 Cu74_2.2@13015.15,2904
  other v1: 12875,2608 13172,2617 13145,2618 12865,2627 13029,2879 13028,2901.47 13028,2923.72
REFB_5V_GM1: Cu4_2_GM1.2 Cu8_1_GM1.2 D6_GM1.2 U4_GM1.8 U8_GM1.6 | length 530.6
  Top Layer w10: v1(2977,3219) 2984.15,3211.85 Cu8_1_GM1.2@2984.15,3196.56
  Top Layer w20: Cu4_2_GM1.2@2983.15,2964 2933,3014.15 2933,3159 2970.56,3196.56 Cu8_1_GM1.2@2984.15,3196.56
  Bottom Layer w8: v1(2977,3219) 2981.73,3214.27 U8_GM1.6@2981.73,3179.21
  Bottom Layer w20: U4_GM1.8@3028.28,2784.13 3043,2798.86 v1(3043,2930.5) v1(3043,2959)
REFB_5V_GM2: Cu4_2_GM2.2 Cu8_1_GM2.2 D6_GM2.2 U4_GM2.8 U8_GM2.6 | length 530.6
  Top Layer w10: v1(4094,3219) 4101.15,3211.85 Cu8_1_GM2.2@4101.15,3196.56
  Top Layer w20: Cu4_2_GM2.2@4100.15,2964 4050,3014.15 4050,3159 4087.56,3196.56 Cu8_1_GM2.2@4101.15,3196.56
  Bottom Layer w8: v1(4094,3219) 4098.73,3214.27 U8_GM2.6@4098.73,3179.21
  Bottom Layer w20: U4_GM2.8@4145.28,2784.13 4160,2798.86 v1(4160,2930.5) v1(4160,2959)
REFB_5V_GM3: Cu4_2_GM3.2 Cu8_1_GM3.2 D6_GM3.2 U4_GM3.8 U8_GM3.6 | length 530.6
  Top Layer w10: v1(5202,3219) 5209.15,3211.85 Cu8_1_GM3.2@5209.15,3196.56
  Top Layer w20: Cu4_2_GM3.2@5208.15,2964 5158,3014.15 5158,3159 5195.56,3196.56 Cu8_1_GM3.2@5209.15,3196.56
  Bottom Layer w8: v1(5202,3219) 5206.73,3214.27 U8_GM3.6@5206.73,3179.21
  Bottom Layer w20: U4_GM3.8@5253.28,2784.13 5268,2798.86 v1(5268,2930.5) v1(5268,2959)
REFB_5V_GM4: Cu4_2_GM4.2 Cu8_1_GM4.2 D6_GM4.2 U4_GM4.8 U8_GM4.6 | length 530.6
  Top Layer w10: v1(6310,3219) 6317.15,3211.85 Cu8_1_GM4.2@6317.15,3196.56
  Top Layer w20: Cu4_2_GM4.2@6316.15,2964 6266,3014.15 6266,3159 6303.56,3196.56 Cu8_1_GM4.2@6317.15,3196.56
  Bottom Layer w8: v1(6310,3219) 6314.73,3214.27 U8_GM4.6@6314.73,3179.21
  Bottom Layer w20: U4_GM4.8@6361.28,2784.13 6376,2798.86 v1(6376,2930.5) v1(6376,2959)
REFB_5V_GM5: Cu4_2_GM5.2 Cu8_1_GM5.2 D6_GM5.2 U4_GM5.8 U8_GM5.6 | length 530.6
  Top Layer w10: v1(7418,3219) 7425.15,3211.85 Cu8_1_GM5.2@7425.15,3196.56
  Top Layer w20: Cu4_2_GM5.2@7424.15,2964 7374,3014.15 7374,3159 7411.56,3196.56 Cu8_1_GM5.2@7425.15,3196.56
  Bottom Layer w8: v1(7418,3219) 7422.73,3214.27 U8_GM5.6@7422.73,3179.21
  Bottom Layer w20: U4_GM5.8@7469.28,2784.13 7484,2798.86 v1(7484,2930.5) v1(7484,2959)
REFB_5V_GM6: Cu4_2_GM6.2 Cu8_1_GM6.2 D6_GM6.2 U4_GM6.8 U8_GM6.6 | length 530.6
  Top Layer w10: v1(8526,3219) 8533.15,3211.85 Cu8_1_GM6.2@8533.15,3196.56
  Top Layer w20: Cu4_2_GM6.2@8532.15,2964 8482,3014.15 8482,3159 8519.56,3196.56 Cu8_1_GM6.2@8533.15,3196.56
  Bottom Layer w8: v1(8526,3219) 8530.73,3214.27 U8_GM6.6@8530.73,3179.21
  Bottom Layer w20: U4_GM6.8@8577.28,2784.13 8592,2798.86 v1(8592,2930.5) v1(8592,2959)
REFB_5V_GM7: Cu4_2_GM7.2 Cu8_1_GM7.2 D6_GM7.2 U4_GM7.8 U8_GM7.6 | length 530.6
  Top Layer w10: v1(9634,3219) 9641.15,3211.85 Cu8_1_GM7.2@9641.15,3196.56
  Top Layer w20: Cu4_2_GM7.2@9640.15,2964 9590,3014.15 9590,3159 9627.56,3196.56 Cu8_1_GM7.2@9641.15,3196.56
  Bottom Layer w8: v1(9634,3219) 9638.73,3214.27 U8_GM7.6@9638.73,3179.21
  Bottom Layer w20: U4_GM7.8@9685.28,2784.13 9700,2798.86 v1(9700,2930.5) v1(9700,2959)
REFB_5V_GM8: Cu4_2_GM8.2 Cu8_1_GM8.2 D6_GM8.2 U4_GM8.8 U8_GM8.6 | length 530.6
  Top Layer w10: v1(10742,3219) 10749.15,3211.85 Cu8_1_GM8.2@10749.15,3196.56
  Top Layer w20: Cu4_2_GM8.2@10748.15,2964 10698,3014.15 10698,3159 10735.56,3196.56 Cu8_1_GM8.2@10749.15,3196.56
  Bottom Layer w8: v1(10742,3219) 10746.73,3214.27 U8_GM8.6@10746.73,3179.21
  Bottom Layer w20: U4_GM8.8@10793.28,2784.13 10808,2798.86 v1(10808,2930.5) v1(10808,2959)
REFB_5V_GM9: Cu4_2_GM9.2 Cu8_1_GM9.2 D6_GM9.2 U4_GM9.8 U8_GM9.6 | length 530.6
  Top Layer w10: v1(11850,3219) 11857.15,3211.85 Cu8_1_GM9.2@11857.15,3196.56
  Top Layer w20: Cu4_2_GM9.2@11856.15,2964 11806,3014.15 11806,3159 11843.56,3196.56 Cu8_1_GM9.2@11857.15,3196.56
  Bottom Layer w8: v1(11850,3219) 11854.73,3214.27 U8_GM9.6@11854.73,3179.21
  Bottom Layer w20: U4_GM9.8@11901.28,2784.13 11916,2798.86 v1(11916,2930.5) v1(11916,2959)
REFC1: C12.1 Cr2_3.1 Cr3_2.1 Cu12_2.1 Cu16_1.1 Q49.3 Q50.3 U12.5 U16.3 Ur2.5 Ur2.7 Ur3.1 Ur3.2 Ur3.4 | length 966.9
  Top Layer w20: Cr2_3.1@2032.53,2770 2025,2762.47 Ur2.7@2025,2692.19 2025,2646.24 2048.24,2623 2101.58,2623 2125,2646.42 Ur2.5@2125,2692.19
  Top Layer w30: Q50.3@2205.29,3301.46 2305.62,3201.13 C12.1@2365.29,3201.13
  Bottom Layer w8: U16.3@2059.2,2956.93 U16.3@2059.2,3002.2
  Bottom Layer w20: U12.5@1926,2748.13 1926,2826.15 Cu12_2.1@1948.85,2849 1948.85,2925.85 2038,3015 U16.3@2072,3015 ; Q49.3@2386,3280.46 Q49.3@2386.55,3281.02
  Bottom Layer w50: v1(2386,3201.2) 2386.55,3201.75 Q49.3@2386.55,3281.02
  other v1: 2269.47,2710.47 2257,2917 2290,2917.28 2188,2917.56 2224,2918 2100,2992 2121,2996 2352,3200.17 2422,3201.2
REFC1_5V: Cr2_3.2 Cr3_2.2 Cu12_2.2 Cu16_1.2 U12.8 U16.6 Ur2.6 Ur2.8 Ur3.3 | length 1083.5
  Top Layer w10: 2060.44,3051.56 Cu16_1.2@2099,3051.56 ; Ur2.6@2075,2692.19 2075,2875 2060,2890 2060,3052 2060,3125 2148,3213 v1(2161,3213)
  Top Layer w20: Cr2_3.2@1973.47,2770 1975,2768.47 Ur2.8@1975,2692.19 ; 2060,3052 2060.44,3051.56
  Bottom Layer w8: U16.6@2059.2,3073.07 2059.2,3124.2 2148,3213 v1(2161,3213)
  Bottom Layer w20: Cu12_2.2@2055.15,2849 2076,2828.15 U12.8@2076,2748.13 2076,2661.53 v1(2073.47,2659)
  other v1: 1997,2607.54 1979,2633 2238.81,2765.28 2271,2766
REFC_5V_GM1: C9_GM1.2 C17_GM1.2 Cr1_1_GM1.2 Cu5_2_GM1.2 Cu20_1_GM1.2 D6_GM1.1 U5_GM1.8 U6_GM1.10 U6_GM1.13 U6_GM1.16 U20_GM1.6 Ur1_GM1.3 | length 1131.9
  Top Layer w10: Cu5_2_GM1.2@3155.85,2837 3177,2858.15 3177,3052 3177,3125 3265,3213 v1(3278,3213) ; 3177.44,3051.56 Cu20_1_GM1.2@3216,3051.56
  Top Layer w20: C17_GM1.2@2868.4,2762 2868.4,2686.6 U6_GM1.16@2870,2685 ; v1(3020,2618.05) U6_GM1.13@3020,2685 ; C9_GM1.2@3167.47,2762 3170,2759.47 U6_GM1.10@3170,2685 ; 3177,3052 3177.44,3051.56
  Top Layer w50: D6_GM1.1@3069,2835 D6_GM1.1@3071,2837
  Bottom Layer w8: U20_GM1.6@3176.2,3073.07 3176.2,3124.2 3265,3213 v1(3278,3213)
  Bottom Layer w20: v1(3183,2610) 3229,2610 3285,2666 U5_GM1.8@3285,2784.13
  other v1: 2886,2608 3153,2610 2876,2627 3355.81,2765.28 3388,2766